# Altium PCB Copy of DOAN1.PcbDoc
Units mm, origin at the board's own origin, x right, y up, seen from the top; angles counter-clockwise.
Board outline 66.55 x 44.07 mm, 2 copper layers (Top Layer, Bottom Layer); 11 components, 16 nets, 74 pads, 5 vias.
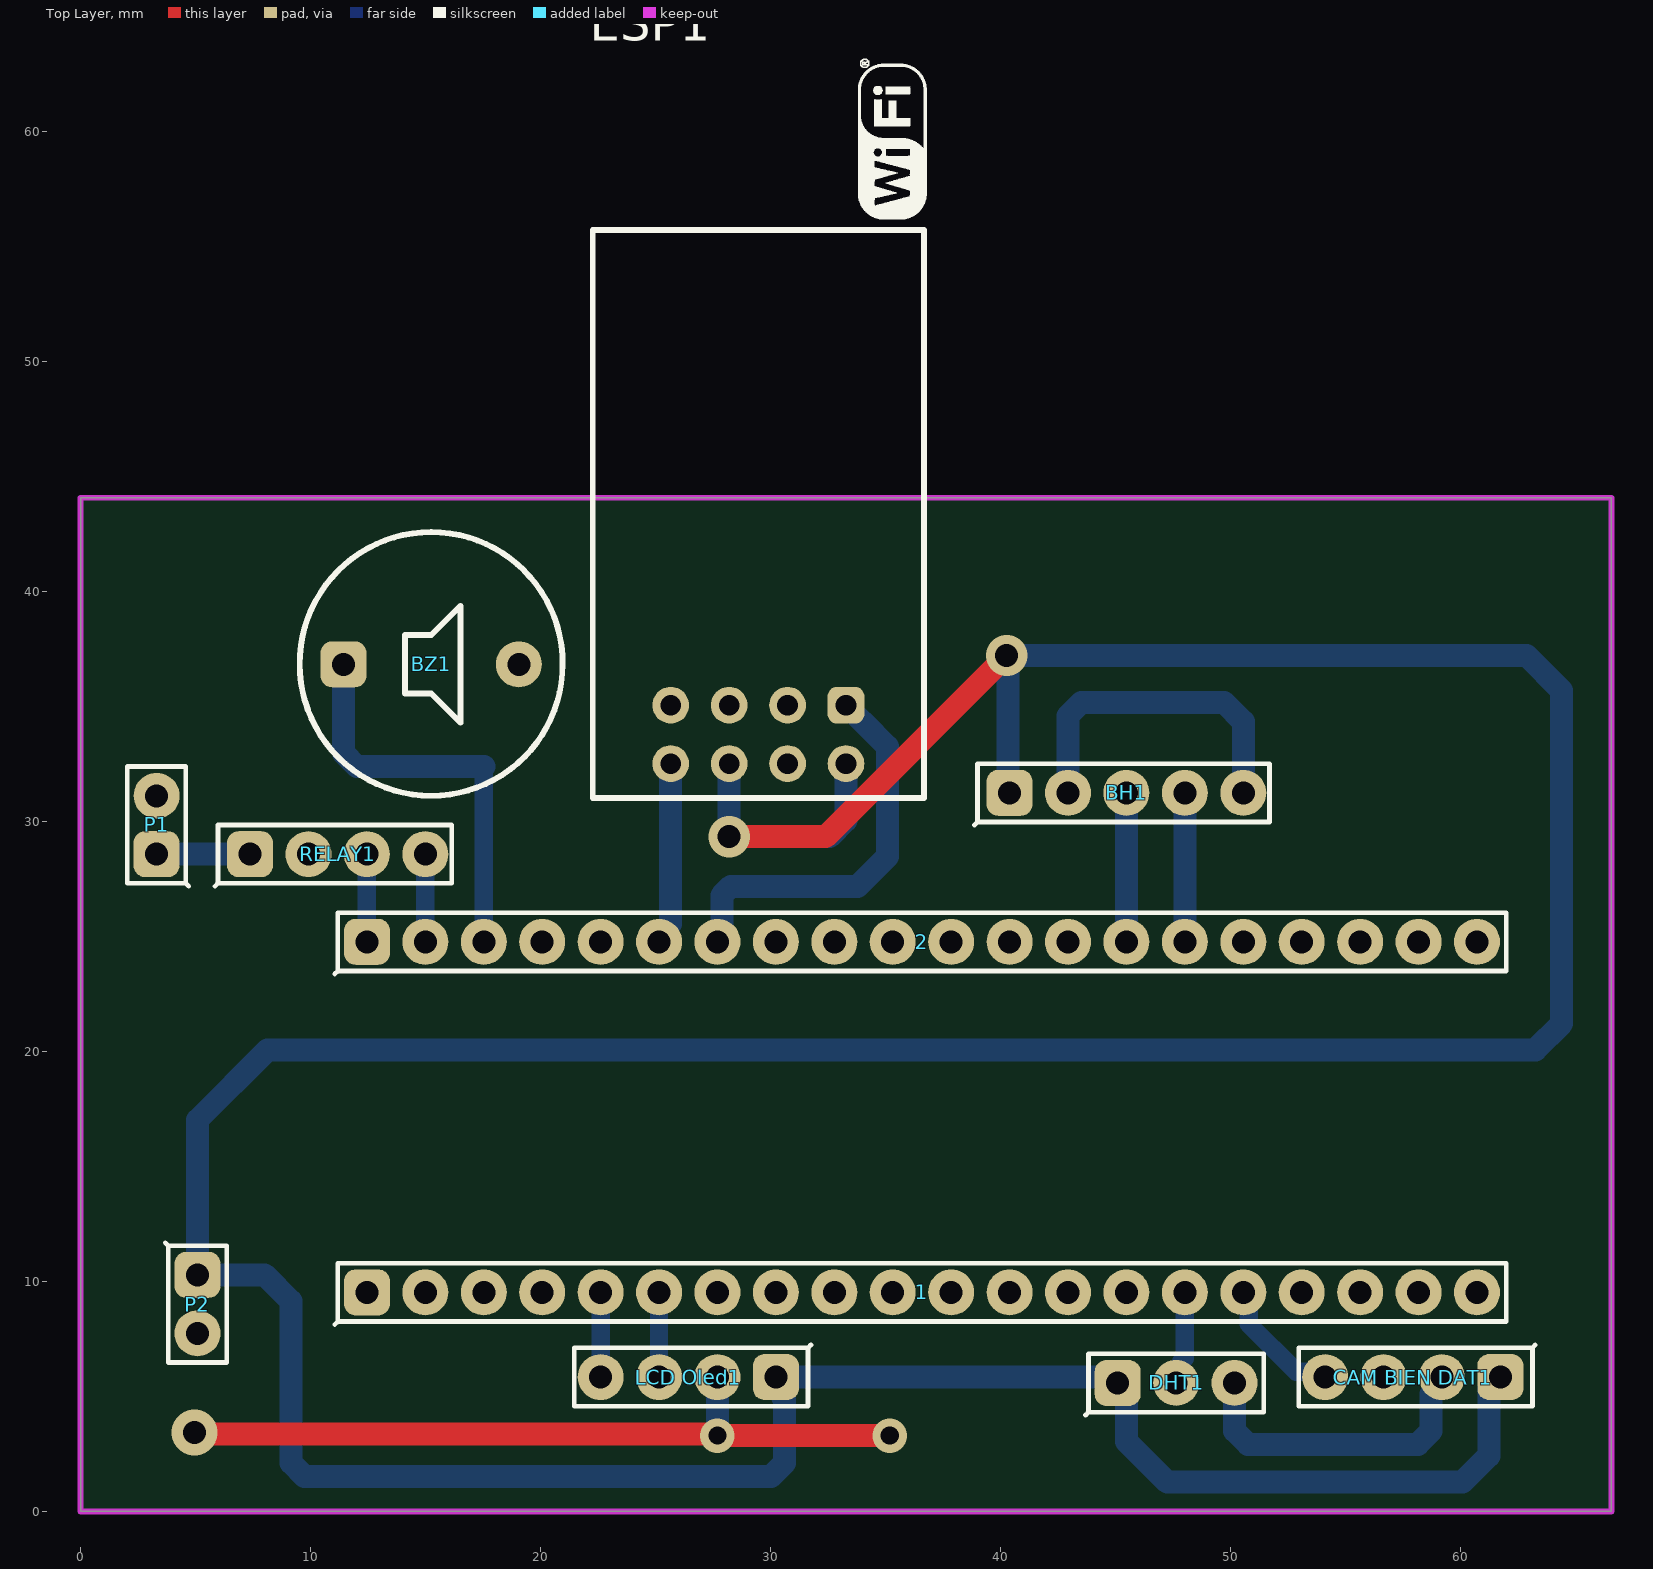
[diagram p0: Top Layer view]
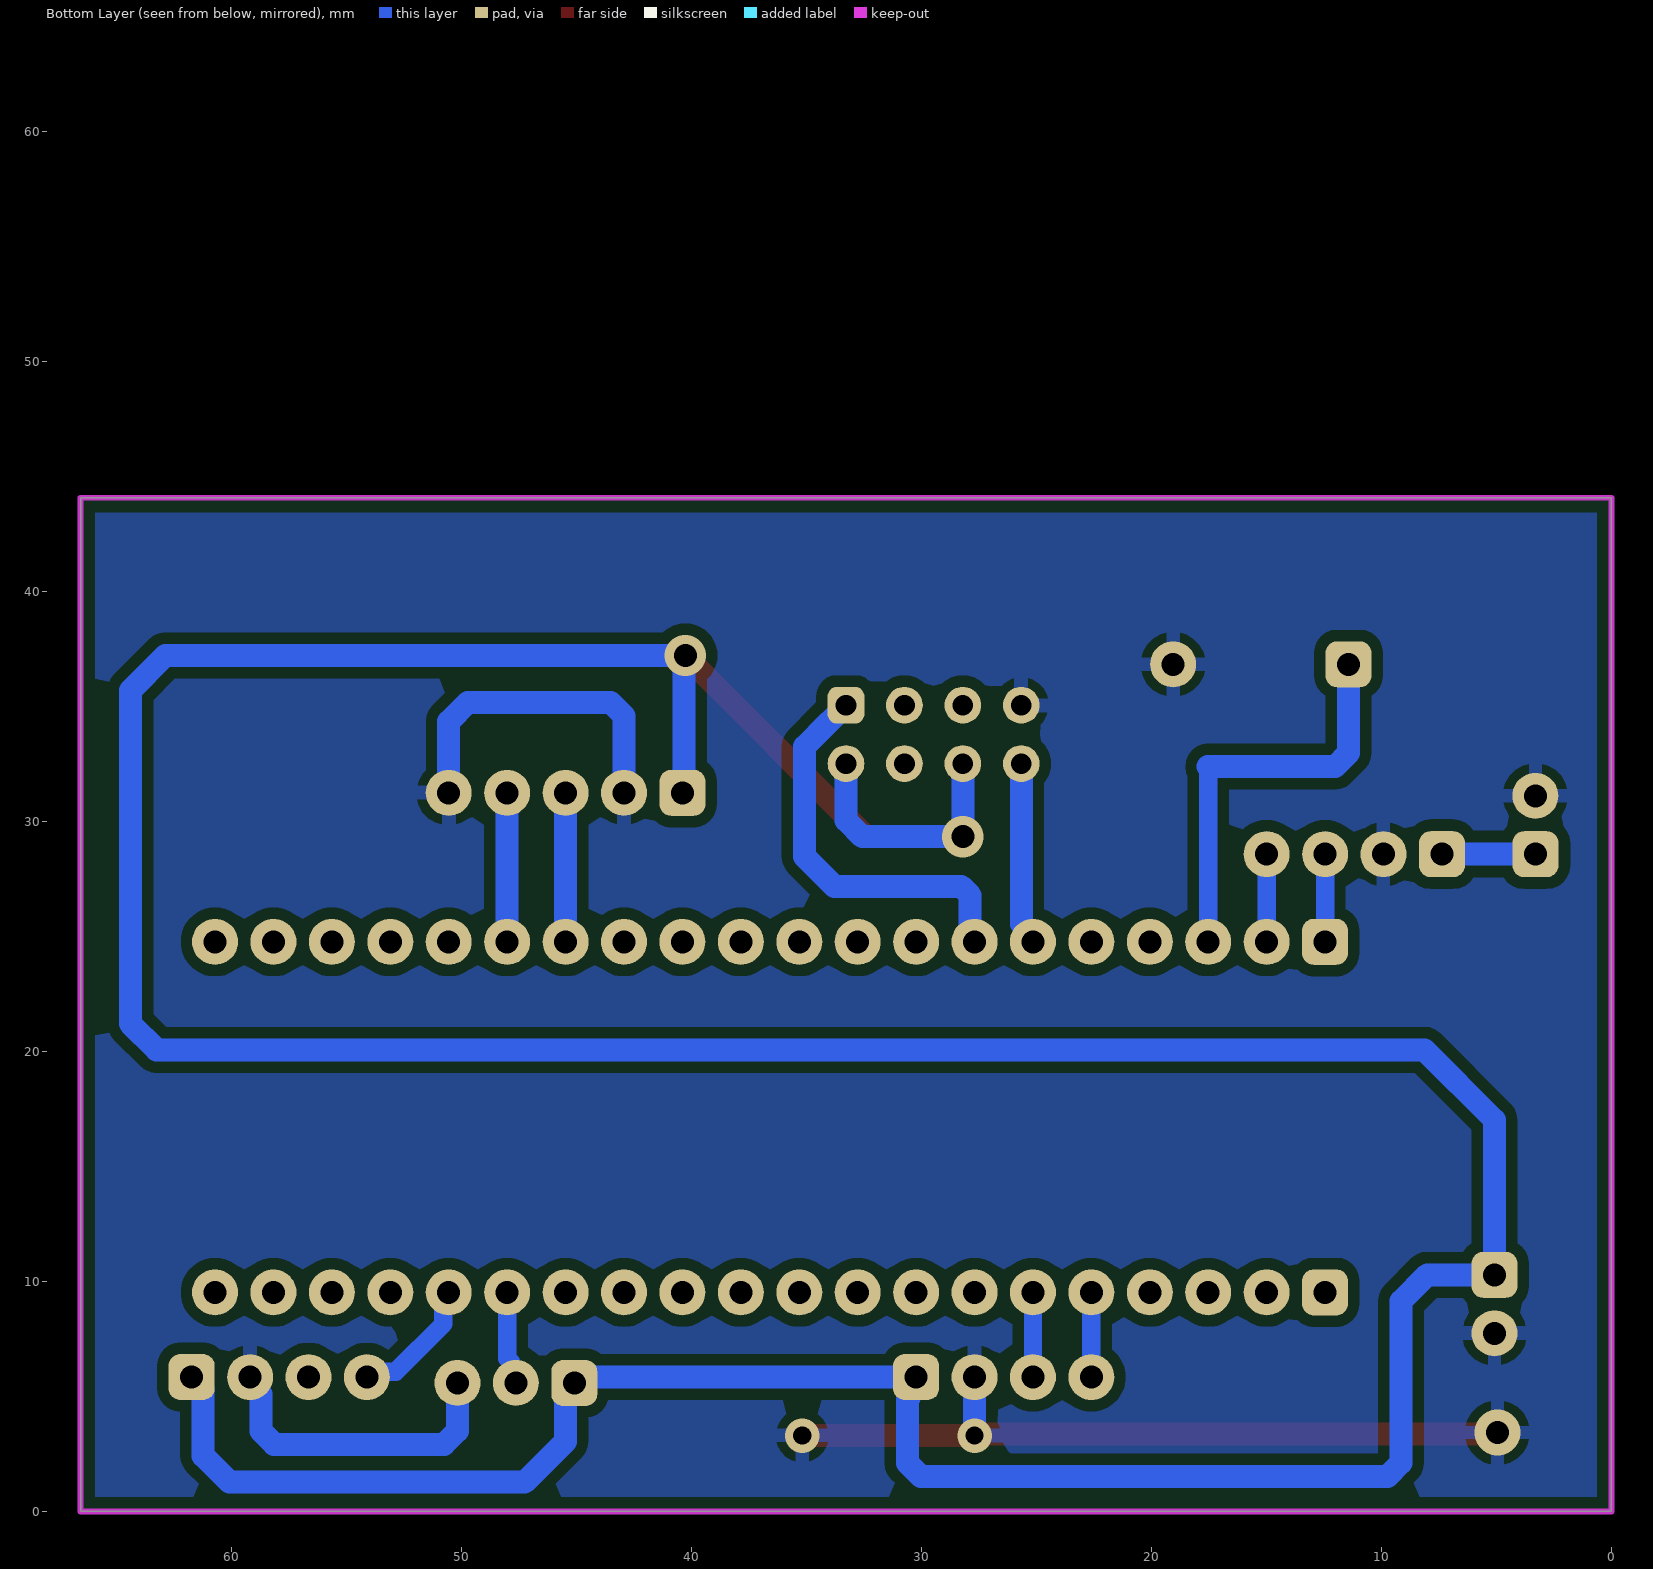
[diagram p1: Bottom Layer view, seen from below]

## Layer stack, top to bottom
Top Solder: solder mask 0.0102, Solder Resist, Dk 3.5
Top Layer: signal copper 0.0356
Dielectric 1: dielectric 0.32, FR-4, Dk 4.8
Bottom Layer: signal copper 0.0356
Bottom Solder: solder mask 0.0102, Solder Resist, Dk 3.5

## Board outline
0,0 66.548,0 66.548,44.069 0,44.069

## Design rules (kind name [scope] priority, off if disabled: settings)
Clearance [All] p1: gap=0.5 ignorepadtopadclearanceinfootprint=TRUE
PolygonConnect [All] p1: connectstyle=Relief reliefconductorwidth=0.6 reliefentries=4 polygonreliefangle="90 Angle" airgapwidth=0.4
RoutingVias RoutingVias_1 [All] p1 off: holewidth=0.711 width=1.27 viastyle="Through Hole" minholewidth=0.711 minwidth=1.27 maxholewidth=0.711 maxwidth=1.27
RoutingVias [InDrillLayerPair('No Drill Pair')] p2: holewidth=0.711 width=1.27 viastyle="Through Hole" minholewidth=0.6 minwidth=1.27 maxholewidth=0.711 maxwidth=1.27
SolderMaskExpansion [All] p1: expansion=0.102 istentingtop=FALSE
SupplyNets "Schematic Supply Nets_3" [InNet('5V')] p1: voltage=0.000
SupplyNets "Schematic Supply Nets_2" [InNet('VCC')] p2: voltage=0.000
SupplyNets "Schematic Supply Nets_1" [InNet('3.3V')] p3: voltage=0.000
SupplyNets "Schematic Supply Nets" [InNet('GND')] p4: voltage=0.000
UnpouredPolygon [InNet('No Net')] p1:
Width [All] p1: maxlimit=1.5 minlimit=0.6 preferedwidth=0.8
29 further rules are at their usual default settings.

## Classes and differential pairs
component class "Copy of DOAN1": P1 P2

## Components (designator, comment, footprint, x,y, rotation, side; value= is the part's Value field where it differs from the comment)
1 "Header 20" HDR/Header/20 36.576,9.525 r0 top
2 "Header 20" HDR/Header/20 36.576,24.765 r0 top
BH1 "BH1750 I2C" HDR/Header/5 45.466,31.242 r0 top (schematic designator "BH1750 I2C")
BZ1 "Buzzer" BUZZER 11.43,36.83 r0 top
"CAM BIEN DAT1" "CAM BIEN DAT" HDR/Header/4 57.912,5.842 r180 top (schematic designator "CAM BIEN DAT")
DHT1 "DHT22" HDR/Header/3 47.625,5.588 r0 top (schematic designator DHT22)
ESP1 "Component_1" "ESP8266 ESP-01" 29.464,33.782 r0 top (schematic designator ESP01)
"LCD Oled1" "LCD Oled" HDR/Header/4 26.416,5.842 r180 top (schematic designator "LCD Oled")
P1 "Header 2" HDR/Header/2 3.302,29.845 r90 top (schematic designator P4)
P2 "Header 2" HDR/Header/2 5.08,9.017 r270 top (schematic designator P3)
RELAY1 "RELAY" HDR/Header/4 11.176,28.575 r0 top (schematic designator RELAY)

## Footprints (in the part's own frame and the unit in brackets; to place one, negate y for a bottom-side part, rotate by r counter-clockwise, add the part's x,y. Pads: shape width x height; smd on the part's side, far side on the other; paste and mask are expansions set on the pad)
BUZZER [mm] "DC Buzzer 5V/12V"
  rrect50% 2x2 hole 1: 1(0,0)
  round 2 hole 1: 2(7.62,0)
  silkscreen extent -1.91,-5.71 9.53,5.75, body extent -5.64,-6 9.81,6, height 9.65
"ESP8266 ESP-01" [mm] "ESP8266 ESP-01"
  rrect50% 1.6x1.6 hole 0.9: 1(3.81,1.27)
  round 1.6 hole 0.9: 2(3.81,-1.27) 3(1.27,1.27) 4(1.27,-1.27) 5(-1.27,1.27) 6(-1.27,-1.27) 7(-3.81,1.27) 8(-3.81,-1.27)
  silkscreen extent -7.2,-2.77 7.31,29.38, body extent -7.28,-2.78 7.22,22.02, height 8.5
HDR/Header/2 [mm]
  rrect50% 2x2 hole 1: 1(-1.27,0)
  round 2 hole 1: 2(1.27,0)
  silkscreen extent -2.67,-1.4 2.54,1.27, body extent -2.54,-1.27 2.54,1.27, height 8.89
HDR/Header/3 [mm]
  rrect50% 2x2 hole 1: 1(-2.54,0)
  round 2 hole 1: 2(0,0) 3(2.54,0)
  silkscreen extent -3.94,-1.4 3.81,1.27, body extent -3.81,-1.27 3.81,1.27, height 8.89
HDR/Header/4 [mm]
  rrect50% 2x2 hole 1: 1(-3.81,0)
  round 2 hole 1: 2(-1.27,0) 3(1.27,0) 4(3.81,0)
  silkscreen extent -5.33,-1.4 4.95,1.27, body extent -5.08,-1.27 5.08,1.27, height 8.89
HDR/Header/5 [mm]
  rrect50% 2x2 hole 1: 1(-5.08,0)
  round 2 hole 1: 2(-2.54,0) 3(0,0) 4(2.54,0) 5(5.08,0)
  silkscreen extent -6.6,-1.4 6.22,1.27, body extent -6.35,-1.27 6.35,1.27, height 8.89
HDR/Header/20 [mm]
  rrect50% 2x2 hole 1: 1(-24.13,0)
  round 2 hole 1: 2(-21.59,0) 3(-19.05,0) 4(-16.51,0) 5(-13.97,0) 6(-11.43,0) 7(-8.89,0) 8(-6.35,0) 9(-3.81,0) 10(-1.27,0) 11(1.27,0) 12(3.81,0) 13(6.35,0) 14(8.89,0) 15(11.43,0) 16(13.97,0) 17(16.51,0) 18(19.05,0) 19(21.59,0) 20(24.13,0)
  silkscreen extent -25.53,-1.4 25.4,1.27, body extent -25.4,-1.27 25.4,1.27, height 8.89

## Part data
P1 P2: "Header, 2-Pin"

## Via types
v1: diameter 1.5, hole 0.8, Top Layer to Bottom Layer, 2 vias
v2: diameter 1.8, hole 1, Top Layer to Bottom Layer, 2 vias
v3: diameter 2, hole 1, Top Layer to Bottom Layer, 1 vias

## Nets (pads, with @x,y where several pads share a name; then routed paths per layer and width w, separated by ;. In a path a pad name is that pad's centre, name@x,y a point inside that pad or via, vN(x,y) a via of type N, cw(c..) or ccw(c..) an arc to the next point about the centre after c; other vN are vias at no path point)
3.3V: "CAM BIEN DAT1.1" "LCD Oled1.1" BH1.1 DHT1.1 ESP1.2 ESP1.6 P2.1 | length 215.4
  Top Layer w1: v2(28.194,29.337) 32.385,29.337 v2(40.259,37.211)
  Bottom Layer w1: ESP1.6 v2(28.194,29.337) 32.561,29.337 33.274,30.05 ESP1.2 ; BH1.1 40.322,31.305 40.322,37.148 v2(40.259,37.211) 62.865,37.211 64.389,35.687 64.389,21.209 63.246,20.066 8.128,20.066 5.08,17.018 P2.1 8.001,10.287 9.144,9.144 9.144,2.11 9.73,1.524 30.021,1.524 30.607,2.11 30.607,4.856 30.526,4.937 30.526,5.542 30.226,5.842 45.466,5.842 45.466,3.048 47.244,1.27 60.071,1.27 61.222,2.421 61.222,5.342 61.722,5.842
5V: P1.1 RELAY1.1 | length 4.1
  Bottom Layer w1: P1.1 RELAY1.1
A0: 1.16 "CAM BIEN DAT1.4" | length 5.8
  Bottom Layer w0.8: 1.16 50.776,9.295 50.776,8.152 52.857,6.071 53.872,6.071 54.102,5.842
A1: 1.15 DHT1.2 | length 4.1
  Bottom Layer w0.8: DHT1.2 47.855,5.818 47.855,6.505 48.006,6.657 1.15
A9: 2.6 ESP1.8 | length 8
  Bottom Layer w1: 2.6 25.146,25.035 25.654,25.543 ESP1.8
A10: 2.7 ESP1.1 | length 17.4
  Bottom Layer w0.8: 2.7 2.7@27.686,24.865
  Bottom Layer w1: 2.7 27.877,24.956 27.877,26.784 28.272,27.178 33.782,27.178 35.074,28.47 35.074,33.258 34.02,34.312 34.014,34.312 ESP1.1
B6: 2.14 BH1.3 | length 6.5
  Bottom Layer w1: 2.14 BH1.3
B7: 2.15 BH1.4 | length 6.5
  Bottom Layer w1: 2.15 BH1.4
B10: 1.6 "LCD Oled1.3" | length 3.7
  Bottom Layer w0.8: 25.146,5.842 1.6
B11: 1.5 "LCD Oled1.4" | length 3.7
  Bottom Layer w0.8: 22.606,5.842 1.5
B12: 2.1 RELAY1.3 | length 3.8
  Bottom Layer w0.8: 2.1 RELAY1.3
B13: 2.2 RELAY1.4 | length 3.8
  Bottom Layer w0.8: 2.2 RELAY1.4
B14: 2.3 BZ1.1 | length 17.8
  Bottom Layer w0.8: 2.3 17.526,32.385
  Bottom Layer w1: BZ1.1 11.43,32.971 12.016,32.385 17.526,32.385
GND: "CAM BIEN DAT1.2" "LCD Oled1.2" BH1.2 BH1.5 BZ1.2 DHT1.3 ESP1.7 P1.2 P2.2 RELAY1.2 | length 61.1
  Top Layer w1: v3(4.953,3.429) 5.016,3.365 27.622,3.365 v1(27.686,3.302) v1(35.179,3.302) ; 27.679,5.835 27.686,5.842
  Bottom Layer w1: v1(27.686,3.302) 27.686,5.842 ; BH1.2 42.926,34.593 43.512,35.179 49.706,35.179 50.546,34.339 BH1.5 ; DHT1.3 50.165,3.507 50.751,2.921 58.132,2.921 58.718,3.507 58.718,5.107 59.182,5.571 59.182,5.842
NetD1_1: 
VCC: 
pads on no net: 1.1 1.2 1.3 1.4 1.7 1.8 1.9 1.10 1.11 1.12 1.13 1.14 1.17 1.18 1.19 1.20 2.4 2.5 2.8 2.9 2.10 2.11 2.12 2.13 2.16 2.17 2.18 2.19 2.20 "CAM BIEN DAT1.3" ESP1.3 ESP1.4 ESP1.5

## Polygon pours and split planes (outlines as drawn)
GND on Bottom Layer "GND_L02_P000" (solid, remove dead copper, pour order 0): 0,44.069 66.548,44.069 66.548,0 0,0

## Keep-outs
Keep-Out Layer:
  the board outline again, w0.254

## Dimensions
66.548,44.069 to 66.548,0 on Bottom Layer
0,44.069 to 66.548,44.069 on Bottom Layer

## Text inside footprints (layer, text, board x,y; h text height)
ESP1: Mechanical 13 "CUTOUT POLYGON" at 22.429,54.816 h0.25; Mechanical 13 "ANTENNA AREA" at 22.429,55.324 h0.25